# EAGLE board Glove-WiFi-M0-v0.5 (EAGLE 7.7.0)
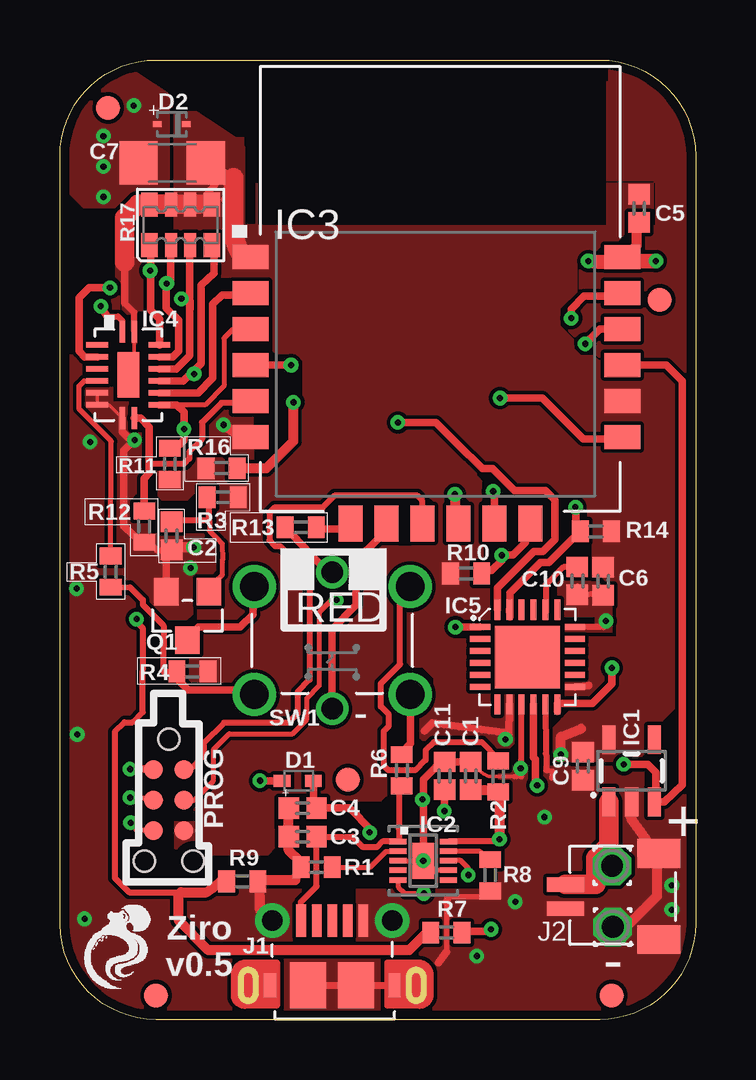
[diagram p0: board, top side]
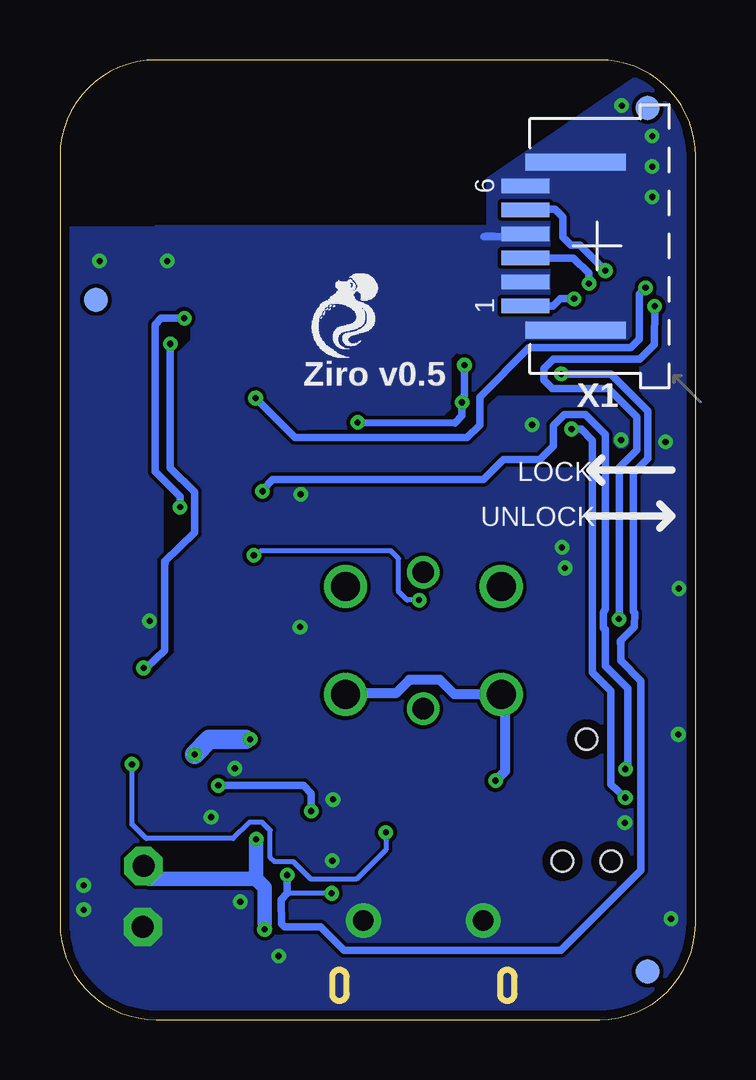
[diagram p1: board, bottom side, seen from below]

Size 26.5 x 40 mm. Coordinates in mm from the lower left corner, seen from the top.
Outline: 0,36.04 0,3.96 arc89 4,0 22.5,0 arc90 26.5,4 26.5,36 arc90 22.51,40 6,40 4,40 arc90 0,36
Copper layers (1*16): Top 0.0356mm / dielectric 1.5011mm / Bottom 0.0356mm
Design rules "oshpark-2layer-via-buried": minimum track width 6mil, minimum drill 10mil, track to track 6mil, track to pad 6mil, pad to pad 6mil, via to via 6mil, smd to smd 6mil, copper to edge 15mil, drill to drill 6mil, minimum pad ring 7mil, minimum via ring 7mil, stop-mask expansion 2.5mil, vias tented up to drill 16mil, thermal gap 10mil
tRestrict: area 16.6,15.9 to 17,16; area 7.7,33.2 to 8.1,38.3; area 21,16.5 to 22.3,16.8; 126 lines
bRestrict: 32 lines

## Footprints (pad centres in the part's own frame; a part is rotated, then mirrored left to right if it is on the bottom)
1,6/0,9 = drill 0.914 pad 1.6 octagon: 1 0,0
0402-CAP = smd 0.85 x 0.9: 1 -0.58,0; 2 0.58,0
1206 = smd 1.6 x 1.8: 1 -1.4,0; 2 1.4,0
SOD523 = smd 0.7 x 0.5: A 0.7,0; C -0.6,0
SOD-923 = smd 0.36 x 0.25: A -0.6,0; C 0.6,0
FIDUCIAL-1X2 = smd 1 x 1: 1 0,0
SOT23-5 = smd 0.55 x 1.2: 1 -0.95,-1.3; 2 0,-1.3; 3 0.95,-1.3; 4 0.95,1.3; 5 -0.95,1.3
BQ24040DSQR = smd 0.7 x 0.23: 1 -1.05,0.8; 2 -1.05,0.4; 3 -1.05,0; 4 -1.05,-0.4; 5 -1.05,-0.8; 6 1.05,-0.8; 7 1.05,-0.4; 8 1.05,0; 9 1.05,0.4; 10 1.05,0.8 | smd 0.914 x 1.499: 11 0,0 | drill 0.254 pad 0.508: V 0,0
WT8266 = smd 1.5 x 1: 1 -7.9,1.35; 2 -7.9,-0.15; 3 -7.9,-1.65; 4 -7.9,-3.15; 5 -7.9,-4.65; 6 -7.9,-6.15; 13 7.6,-6.15; 14 7.6,-4.65; 15 7.6,-3.15; 16 7.6,-1.65; 17 7.6,-0.15; 18 7.6,1.35 | smd 1 x 1.5: 7 -3.75,-9.75; 8 -2.25,-9.75; 9 -0.75,-9.75; 10 0.75,-9.75; 11 2.25,-9.75; 12 3.75,-9.75
DHVQFN16 = smd 0.24 x 0.9: 1 -0.25,1.8; 8 -0.25,-1.8; 9 0.25,-1.8; 16 0.25,1.8 | smd 0.9 x 0.24: 2 -1.3,1.25; 3 -1.3,0.75; 4 -1.3,0.25; 5 -1.3,-0.25; 6 -1.3,-0.75; 7 -1.3,-1.25; 10 1.3,-1.25; 11 1.3,-0.75; 12 1.3,-0.25; 13 1.3,0.25; 14 1.3,0.75; 15 1.3,1.25 | smd 0.9 x 1.9: EPAD 0,0
QFN.24.4X4 = smd 0.85 x 0.25: 1 -1.975,1.25; 2 -1.975,0.75; 3 -1.975,0.25; 4 -1.975,-0.25; 5 -1.975,-0.75; 6 -1.975,-1.25; 13 1.975,-1.25; 14 1.975,-0.75; 15 1.975,-0.25; 16 1.975,0.25; 17 1.975,0.75; 18 1.975,1.25 | smd 0.25 x 0.85: 7 -1.25,-1.975; 8 -0.75,-1.975; 9 -0.25,-1.975; 10 0.25,-1.975; 11 0.75,-1.975; 12 1.25,-1.975; 19 1.25,1.975; 20 0.75,1.975; 21 0.25,1.975; 22 -0.25,1.975; 23 -0.75,1.975; 24 -1.25,1.975 | smd 2.7 x 2.6: EPAD 0,0
USB-MICRO-MOLEX-105017-0001 = smd 0.4 x 1.35: 1 -1.3,1.3; 2 -0.65,1.3; 3 0,1.3; 4 0.65,1.3; 5 1.3,1.3 | drill 0.85 pad 1.45: G1 -2.5,1.3; G2 2.5,1.3 | smd 1.5 x 1.9: G3 1,-1.4; G4 -1,-1.4 | smd 0.5 x 1: G5 -2.6,-1.4; G6 2.6,-1.4
CONN-JST-SHR-1MM = smd 0.6 x 1.55: 1 -0.5,1.8; 2 0.5,1.8 | smd 1.2 x 1.8: EP@1 -1.8,-2.1; EP@2 1.8,-2.1
TC2030-MCP-NL = smd 0.787 x 0.787: 1 1.27,-0.635; 2 1.27,0.635; 3 2.54,-0.635; 4 2.54,0.635; 5 3.81,-0.635; 6 3.81,0.635 | hole 0.889: 0,0; 5.08,-1.016; 5.08,1.016
SOT-23 = smd 1.016 x 1.143: 1 -0.889,-1.016; 2 0.889,-1.016; 3 0,1.016
R0402 = smd 0.7 x 0.9: 1 -0.65,0; 2 0.65,0
RA1206-8 = smd 0.7 x 1: 1 -1.3,-0.85; 4 1.3,-0.85; 5 1.3,0.85; 8 -1.3,0.85 | smd 0.5 x 1: 2 -0.4,-0.85; 3 0.4,-0.85; 6 0.4,0.85; 7 -0.4,0.85
TACTILE-LED-ON-MOM = drill 1.2: A-1 -3.25,2.25; A-2 3.25,2.25; B-1 -3.25,-2.25; B-2 3.25,-2.25 | drill 0.9: DA 0,2.85; DC 0,-2.85
CONN-6POS-FPC = smd 0.6 x 2: 1 -2.5,3; 2 -1.5,3; 3 -0.5,3; 4 0.5,3; 5 1.5,3; 6 2.5,3 | smd 0.7 x 4.2: EPAD@1 -3.5,0.9; EPAD@2 3.5,0.9

## Placement (x,y rotation side)
B+  WIREPAD1,6/0,9  [1,6/0,9]  23.02,6.4 90 top
B-  WIREPAD1,6/0,9  [1,6/0,9]  23.05,3.86 90 top
C1  10uF  [0402-CAP]  17.13,10.16 90 top
C2  10uF  [0402-CAP]  4.66,20.17 270 top
C3  0.1uF  [0402-CAP]  10.12,7.62 180 top
C4  DNI  [0402-CAP]  10.12,8.81 180 top
C5  10uF  [0402-CAP]  24.15,33.81 270 top
C6  0.1uF  [0402-CAP]  22.64,18.27 270 top
C7  100u  [1206]  4.68,35.71 180 top
C9  10nF  [0402-CAP]  21.8,10.57 270 top
C10  2.2nF  [0402-CAP]  21.57,18.28 270 top
C11  0.1uF  [0402-CAP]  16.04,10.16 90 top
D1  PMEG3005EB  [SOD523]  9.96,9.96 180 top
D2  ESD9X5.0ST5G  [SOD-923]  4.67,37.31 0 top
FD1  FIDUCIAL1X2  [FIDUCIAL-1X2]  12,10 0 top
FD2  FIDUCIAL1X2  [FIDUCIAL-1X2]  4,1 0 top
FD3  FIDUCIAL1X2  [FIDUCIAL-1X2]  23,1 0 top
FD5  FIDUCIAL1X2  [FIDUCIAL-1X2]  2,38 0 top
FD6  FIDUCIAL1X2  [FIDUCIAL-1X2]  25,30 0 top
FD7  FIDUCIAL1X2  [FIDUCIAL-1X2]  25,30 0 bottom
FD8  FIDUCIAL1X2  [FIDUCIAL-1X2]  2,2 0 bottom
FD9  FIDUCIAL1X2  [FIDUCIAL-1X2]  2,38 0 bottom
IC1  AP2112K-3.3V  [SOT23-5]  23.84,10.37 0 top
IC2  BQ24040DSQR_BMS  [BQ24040DSQR]  15.15,6.62 0 top
IC3  WT8266  [WT8266]  15.86,30.43 0 top
IC4  74HC4051_DHVQFN16  [DHVQFN16]  2.85,26.87 0 top
IC5  MPU-6050  [QFN.24.4X4]  19.5,15.11 0 top
J1  Micro-USB  [USB-MICRO-MOLEX-105017-0001]  11.35,2.83 0 top
J2  [CONN-JST-SHR-1MM]  22.87,5.13 90 top
PROG  [TC2030-MCP-NL]  4.54,11.69 270 top
Q1  2N7002-NMOS  [SOT-23]  5.32,16.83 180 top
R1  3k  [R0402]  10.7,6.35 0 top
R2  10k  [R0402]  18.27,10.13 270 top
R3  300k  [R0402]  6.79,21.77 0 top
R4  300k  [R0402]  5.52,14.51 180 top
R5  3k  [R0402]  2.12,18.67 90 top
R6  30k  [R0402]  14.26,10.39 90 top
R7  30k  [R0402]  16.11,3.63 0 top
R8  10k  [R0402]  17.94,6.02 90 top
R9  3k  [R0402]  7.6,5.76 180 top
R10  3k  [R0402]  16.94,18.59 180 top
R11  3k  [R0402]  4.58,23.16 270 top
R12  3k  [R0402]  3.51,20.55 90 top
R13  330E  [R0402]  10.04,20.52 0 top
R14  3k  [R0402]  22.34,20.35 0 top
R16  3k  [R0402]  6.74,22.99 180 top
R17  500k  [RA1206-8]  5.03,33.12 0 top
SW1  [TACTILE-LED-ON-MOM]  11.35,15.8 0 top
U$1  [OCTO_LOGO]  0.61,1.09 0 top
U$2  [OCTO_LOGO]  16.4,27.4 0 bottom
X1  CONN-FPC-6POS  [CONN-6POS-FPC]  4.1,32.24 90 bottom

## Library data of the parts
B+ B- = wirepad
C1-C6 C9-C11 = 1_ZeroUI; PROD_ID: CAP-12416
C7 = SparkFun-Passives
D1 = diode
D2 IC3-IC5 J1 J2 SW1 U$1 U$2 X1 = 1_ZeroUI
FD1-FD3 FD5-FD9 = SparkFun-Aesthetics
IC1 = SparkFun-PowerIC; PROD_ID: VREG-12457
IC2 = 1_ZeroUI; 3D_LIBRARY_NAME: TI_AllParts_2012-12-25; COPYRIGHT: Copyright (C) 2015 Accelerated Designs. All rights reserved; DATASHEETURL: http://www.ti.com/lit/gpn/BQ24040; FAMILY_NAME: BATTERY CHARGE MANAGEMENT; GENERIC_PART_NUMBER: BQ24040; INDUSTRY_STD_PKG_TYPE: SON; MANUFACTURER: Texas Instruments; MANUFACTURER_PART_NUMBER: BQ24040DSQR; PACKAGE_DESIGNATOR: DSQ; PIN_COUNT: 10; VENDOR: Vendor
PROG = tag-connect
Q1 = 1_ZeroUI; MPN: 2N7002,215
R1-R14 R16 = rcl
R17 = Seeed-OPL-Resistor

## Nets
3.3V: C5.1 C6.1 C7.1 C9.1 D2.C IC1.5 IC3.1 IC3.14 IC4.16 IC4.EPAD IC5.8 IC5.13 PROG.6 R3.2 R4.1 R10.2 R11.2 R14.2 R16.2 R17.5 R17.6 R17.7 R17.8
5V: C3.1 IC2.1 J1.1 R6.1
/POWEROFF_SWINT: IC4.5 R5.2
/RST: IC3.12 PROG.4 R10.1
CHG_ON: IC2.5 IC2.8 IC4.12 R17.4
GND: B-.1 C1.2 C2.2 C3.2 C4.2 C5.2 C6.2 C7.2 C9.2 C10.2 C11.2 D2.A IC1.2 IC2.3 IC2.7 IC2.11 IC2.V IC3.6 IC3.10 IC3.18 IC4.6 IC4.7 IC4.8 IC5.1 IC5.9 IC5.11 IC5.18 J1.5 J1.G1 J1.G2 J1.G3 J1.G4 J1.G5 J1.G6 J2.1 J2.EP@1 J2.EP@2 PROG.5 Q1.2 R1.1 R8.1 R9.1 R12.1 X1.2 X1.4 X1.6 X1.EPAD@1 X1.EPAD@2
I2C_N: IC3.4 IC5.24 R16.1
I2C_P: IC3.17 IC5.23 R14.1
LED-G-A: IC3.7 R13.2
LED-G-C: IC3.8 SW1.DC
MPU_INT: IC3.16 IC5.12
MUX_COM: IC3.13 IC4.3
MUX_S0: IC3.2 IC4.11
MUX_S2: IC3.5 IC4.9 R12.2
N$1: IC4.15 R17.1 X1.5
N$2: C11.1 IC5.10
N$3: C10.1 IC5.20
N$4: IC4.14 R17.2 X1.3
N$5: IC4.13 R17.3 X1.1
N$6: R13.1 SW1.DA
N$9: C2.1 Q1.1 R3.1
N$10: IC2.2 R1.2
N$11: Q1.3 R2.1 SW1.A-1 SW1.A-2
N$12: D1.A R4.2 R5.1 R6.2 SW1.B-1 SW1.B-2
N$13: IC2.9 R8.2
PROGL/MUX_S1: IC3.3 IC4.10 PROG.3 R11.1
PWR_EN: C4.1 D1.C IC1.3 IC3.15
RXD: IC3.9 PROG.2
TXD: IC3.11 PROG.1
V_BATT: B+.1 C1.1 IC1.1 IC2.10 J2.2 R2.2 R7.2
VBATT_SENSE: IC4.1 R7.1 R9.2

## Tracks (layer width: path | path; a pad name or v marks a point on that pad's centre or on a via)
3.3V  (via drill 0.25)
  Top 0.152: IC4.16 3.1,27.12 IC4.EPAD
  Top 0.254: IC4.16 3.1,29.47 2.7,29.86
  Top 0.305: 2.7,29.86 2.69,31.57 | 5.8,33.98 6.87,35.31 | 6.87,35.31 C7.1 | 6.87,34.18 7.25,35.1 6.87,35.31 | IC5.13 21.82,13.88 22.06,13.92 | 15.2,12.04 15.53,12.37 18.5,11.96 v18.58,11.68 18.73,11.73 IC5.8 | R17.6 R17.7 R17.8
  Top 0.406: v20.89,11.05 20.89,11.79 21.73,12.12
  Top 0.813: 2.69,31.57 2.7,32.06 2.7,33.43 3.26,33.98 5.8,33.98 | 7.48,32.02 7.25,32.61 7.25,35.1
  Bottom 0.406: v18.58,11.68 18.75,11.68
  Bottom 0.813: 18.75,11.68 20.28,11.68 v20.89,11.05
  pour Top (rank 2, no thermals): 29.75,-0.19 -0.73,-0.19 -0.73,31.75 4.8,31.72 4.8,37.8 6.18,37.8 6.18,44.3 5.11,44.3 5.12,48.26 29.75,48.26
5V
  Top 0.254: C3.1 12.2,7.62 12.64,7.18 13.21,7.18 13.44,7.42 13.75,7.42 14.13,7.42 | 14.13,7.42 14.13,7.95 14.13,9.58 R6.1 | J1.1 10.05,4.52 10.04,4.51 10.04,4.9 10.7,5.56 C3.1 | IC2.1 14.13,7.42
  Top 0.305: C3.1
/POWEROFF_SWINT
  Top 0.203: R5.2 2.14,24.11 0.8,25.45 0.8,25.6 0.8,26.41 1.01,26.62 IC4.5
/RST  (via drill 0.25)
  Top 0.152: IC3.12 19.5,20.59 19.31,20.32
  Top 0.203: PROG.4 5.59,9.14 6.4,9.96 6.4,11.25 7.06,11.91 9.69,11.91 10.3,12.52 10.3,13.39 10.82,13.92 10.83,16.99 11.32,17.48 v11.53,17.48 | 17.46,18.72 R10.1 | 19.41,20.28 19.39,20.43
  Top 0.305: 19.39,20.43 19.31,20.32 19.31,20.43 | 19.54,20.72 IC3.12 | 17.46,18.72 17.86,18.72 18,18.72 18.42,19.14 v18.42,19.36 18.88,19.36 19.41,19.89 19.41,20.28
  Bottom 0.203: v11.53,17.48 12.03,17.48 12.38,17.84 12.38,19.21 12.7,19.53 18.12,19.53 v18.42,19.36
CHG_ON  (via drill 0.25)
  Top 0.203: IC2.5 14.1,5.54 14.4,5.25 v15.17,5.26 | v17.03,6.02 17.03,6.31 16.71,6.63 IC2.8
  Top 0.305: 5.13,26.62 5.88,27.35 5.88,29.9 5.88,30.62 6.43,31.11 6.43,32.28 R17.4 | 5.13,26.62 IC4.12 | 5.13,26.62 5.46,26.93 v5.6,26.91
  Bottom 0.203: v15.17,5.26 17.03,5.26
  Bottom 0.305: v17.03,6.02 17.03,5.26 17.28,5 17.27,4 17.13,3.86 15.63,3.86 14.65,2.88 5.62,2.88 2.29,6.22 2.29,14.12 3.13,14.97 3.13,15.75 3.13,15.67 3.13,15.77 2.54,16.36 2.54,16.94 2.59,17.02 2.59,22.78 1.98,23.39 1.98,25.37 3.52,26.91 v5.6,26.91
GND  (via drill 0.25)
  Top 0.152: IC4.8 2.05,25.62 IC4.7 IC4.6 | 17.41,10.54 arc49 17.9,10.13 18.94,10.13
  Top 0.203: 14.1,6.6 IC2.3 IC2.V | IC2.7 15.56,6.22 | 16.11,4.9 16.11,2.83 | C1.2 17.39,10.54 17.41,10.54 | 16.15,5.1 16.19,5.05 | 18.94,10.13 19.04,10.15 | 20.28,10.39 20.56,10.36 20.5,10.09 20.51,10.06 | PROG.5 3.2,7.88 3.05,8.2 v2.95,8.2
  Top 0.254: 16.01,10.75 C11.2 | IC5.18 22.67,16.36 22.84,16.51 | 21.58,18.07 C10.2 22.84,17.8 C6.2 | R8.1 17.92,5.36 17.67,5.12 17.57,5.12 16.15,5.1 | IC5.9 19.24,13.12 19.24,10.13 19.04,10.15 | IC5.11 20.25,11.07 20.28,11.03 20.28,10.39 | 3.71,19.91 4.06,19.56 C2.2 | 23.07,31.62 23.63,31.62 23.66,31.75 22.21,31.67 22.21,31.45 22.28,31.42 22.92,31.42 23.05,31.5
  Top 0.305: 11.06,1.4 J1.G6 | 15.56,6.22 IC2.V 15.15,10 15.86,10.72 15.89,10.72 C11.2 | 16.11,2.83 15.78,2.36 | C5.2 24.04,33.18 | 23.55,31.77 23.53,31.77 23.37,31.8 IC3.18 | C1.2 16.01,10.75 | 16.68,20.65 IC3.10 | 7.73,24.16 IC3.6 | 16.19,5.05 16.11,4.9 | IC4.8 2.6,24.51 2.95,24.16 v3.11,24.16 2.67,23.71 2.67,20.58 3.08,20.17 3.71,19.91 R12.1 | 22.84,16.51 22.87,16.54 22.87,16.66 22.82,16.71 | Q1.2 4.43,19.41 C2.2 | IC5.1 17.44,16.36 v16.49,16.36 16.47,16.28 | R9.1 9.38,5.82
  Top 0.406: 24.04,33.18 24.04,32.26 23.55,31.77 | J1.G1 8.35,4.55 8.32,5.82 9.38,5.82 9.81,5.82 10.03,6.27 R1.1 10.03,6.57 9.53,7.06 C3.2 C4.2 | v6.82,24.79 7.73,24.16 | v16.47,21.89 16.47,20.73 16.49,20.7 16.49,20.65 | v22.03,31.62 22.06,31.67 | 23.25,31.67 23.33,31.6 23.35,31.62 | v5.57,19.68 4.68,19.68 | 4.71,19.61 4.68,19.58 4.7,19.56 C2.2 | 23.6,3.86 24.9,5.16 24.9,6.86 23.81,8.39 IC1.2 | 22.03,31.55 22.06,31.67 | 22.06,31.67 22.21,31.67 23.25,31.67 | 23.25,31.67 23.43,31.75
  Top 0.61: v24.85,31.62 23.07,31.62
  Bottom 0.305: X1.4 7.21,32.64 8.47,32.64 | 8.47,32.64 8.82,32.64 | X1.6 7.13,34.77 | 8.47,32.64 8.42,32.66 8.72,32.66
  other vias: 1.81,36.83 1.81,35.56 1.81,34.29 3.08,38.1 22.77,16.62 17.38,2.65 19.21,10.47 25.51,5.59 25.51,4.58 5.44,18.82 0.69,17.97 0.72,11.89 18.98,4.91 1.25,24.08 15.11,9.17 20.2,8.44 1.02,4.2
  pour Bottom (isolate 0.025, rank 2, no thermals): 25.94,-2.54 25.94,3.81 28.48,3.81 28.48,41.91 -3.27,41.91 -3.27,-2.54
  pour Top (isolate 0.025, rank 3, no thermals): 4.61,37.18 4.61,38.37 1.65,41.29 -1.69,41.25 -1.69,33.99 -1.72,33.99 -1.72,22.92 8,22.92 7.9,37.1
  pour Top (no thermals): 20.81,18.64 22.07,18.67 22.97,17.47 22.97,16.05 20.78,16.05
  pour Top (no thermals): -2.02,19.79 1.48,19.79 3.32,17.81 3.29,16.72 3.21,12.6 2.29,12.15 2.21,6 2.22,5.97 3.01,5.36 18.37,5.36 18.37,10.49 27.24,10.49 27.21,-1.27 -2,-1.27
  pour Top (no thermals): 0.01,26.54 2.04,26.54 2.04,25.65 3.56,24.27 3.56,20.17 6.24,20.19 6.74,19.54 6.74,16.59 3.03,16.56 3.03,17.25 1.97,18.31 0.01,18.39
I2C_N  (via drill 0.25)
  Top 0.305: IC3.4 v9.63,27.28 | IC5.24 18.25,18 19.76,19.51 20.13,19.51 20.63,20.01 20.63,21.65 20.23,22.05 18.94,22.05 18.02,22.96 17.61,22.96 16.56,24.01 15.68,24.89 v14.09,24.89
  Top 0.406: R16.1 8.61,22.99 9.74,24.11 v9.74,25.73
  Bottom 0.305: v9.63,27.28 9.63,26.01 9.74,25.91 v9.74,25.73 9.74,25.17 10.04,24.87 v14.09,24.89
I2C_P  (via drill 0.25)
  Top 0.152: IC3.17 23.35,30.25 23.25,30.15
  Top 0.305: 21.55,20.47 21.5,20.15 20.39,19.05 20.02,19.05 18.75,17.78 18.75,16.79 IC5.23 | 23.25,30.15 21.85,30.15 21.32,29.62 v21.32,29.23 | v21.5,21.36 21.52,20.45 21.55,20.47 | 21.55,20.47 21.5,20.3 21.8,20.3 R14.1
  Bottom 0.305: v21.32,29.23 22.28,29.23 22.54,28.98 22.54,22.84 21.5,21.79 v21.5,21.36
LED-G-A
  Top 0.152: 11.95,20.57 11.95,20.63
  Top 0.254: 11.77,20.45 11.95,20.57 | 11.95,20.63 IC3.7
  Top 0.305: R13.2 10.97,20.45 11.77,20.45
LED-G-C
  Top 0.305: IC3.8 13.5,20.11 13.27,20.05 12.34,19.13 12.34,17.28 11.34,16.27 11.34,12.97 SW1.DC
MPU_INT  (via drill 0.25)
  Top 0.305: IC3.16 22.51,28.78 v21.9,28.17 | v23.02,14.66 23.02,13.98 22.21,13.17 20.75,13.17 20.75,12.85 IC5.12
  Bottom 0.305: v21.9,28.17 21.9,22.99 20.89,21.99 20.89,20.3 22.13,19.08 22.12,19.01 22.13,19.02 22.13,15.39 22.88,14.67 v23.02,14.66
MUX_COM  (via drill 0.25)
  Top 0.152: IC3.13 23.04,24.28 22.96,24.2
  Top 0.305: IC4.3 1.03,27.62 0.8,27.86 0.8,30.09 1.22,30.51 v2.09,30.5 | v18.35,25.91 20.12,25.91 21.83,24.2 22.96,24.2
  Bottom 0.305: v2.09,30.5 2.35,30.24 2.35,28.36 2.69,28.02 6.94,28.02 9,25.96 9,24.79 9.53,24.26 16.7,24.26 v18.35,25.91
MUX_S0
  Top 0.152: 7.32,30.23 7.32,30.2
  Top 0.203: 7.32,30.23 7.37,30.28 IC3.2
  Top 0.305: IC4.11 5.75,26.12 6.37,26.74 6.37,29.82 6.76,30.2 7.32,30.2
MUX_S2
  Top 0.152: 7.8,25.7 7.8,25.72 IC3.5
  Top 0.254: 7.8,25.7 6.74,25.7 5.93,24.89 5.93,24.19 5.39,23.67 5.39,23.38 5.17,23.16 3.73,23.16
  Top 0.305: IC4.9 3.18,25.07 3.35,25.07 3.73,24.7 3.73,23.16 3.72,22.88 3.72,22.78 3.51,22.55 R12.2
N$1  (via drill 0.25)
  Top 0.305: IC4.15 4.15,29.21 3.78,29.58 3.78,31.23 | v3.76,31.22 3.78,31.23 | 3.78,31.23 3.78,32.22 R17.1
  Bottom 0.305: X1.5 6.97,33.78 5.87,33.78 5.54,33.45 5.54,32.61 5.21,32.28 4.83,32.28 v3.76,31.22
N$2  (via drill 0.25)
  Top 0.305: C11.1 v16.03,8.69 | v19.9,9.75 19.82,9.88 19.82,10.85 19.74,10.93 IC5.10
  Bottom 0.305: v16.03,8.69 16.03,9.43 16.35,9.75 v19.9,9.75
N$3
  Top 0.254: 21.74,19 C10.1 21,18.86 20.25,18.12 20.25,16.95 IC5.20
N$4  (via drill 0.25)
  Top 0.305: IC4.14 4.69,27.62 4.94,27.87 4.94,29.16 4.43,29.65 4.43,30.46 v4.45,30.68 4.45,30.63 4.62,30.81 R17.2
  Bottom 0.305: X1.3 5.58,31.75 5.1,31.75 4.45,31.11 v4.45,30.68
N$5  (via drill 0.25)
  Top 0.305: IC4.13 4.85,27.12 5.42,27.69 5.42,29.57 | 5.42,29.57 5.42,29.62 5.42,29.95 v5.06,30.05 | 5.42,29.57 5.42,31.8 5.44,32 R17.3
  Bottom 0.305: X1.1 5.95,29.74 5.64,30.05 v5.06,30.05
N$6
  Top 0.305: SW1.DA 11.17,18.66 9.72,20.18 R13.1
N$9
  Top 0.203: 6.15,18.03 6.11,18.25 6.52,18.3 6.77,18.55 6.77,19.16 6.77,19.83 6.54,20.07 6.23,20.37 6.23,20.82 6.22,20.83
  Top 0.254: 6.36,17.93 6.33,18.14 6.15,18.03 | R3.1 6.13,21.64 6.22,21.53 6.22,20.83 4.86,20.83 C2.1
  Top 0.305: Q1.1 6.36,17.93
N$10
  Top 0.203: R1.2 12.93,6.35 13.59,7.01 14.13,7.01 IC2.2
N$11
  Top 0.254: 18.27,10.87 17.58,11.56 15.57,11.56 15.25,11.23 15.25,10.82 14.82,10.39 13.69,10.39 13.5,10.58 13.5,12.02 13.72,12.24 13.72,12.71 13.38,13.04 13.38,14.01 14.18,14.81 14.18,17.66 SW1.A-2
  Top 0.305: SW1.A-1 8.06,16.89 7.5,16.36 5.79,16.36 5.52,16.08 Q1.3 | R2.1 18.27,10.87
N$12  (via drill 0.25)
  Top 0.254: R5.1 2.91,18.03 3.45,17.49 3.45,17.3 3.91,16.84 4.32,16.43 4.31,14.5 R4.2
  Top 0.305: v8.34,9.96 D1.A | R6.2 14.26,11.12 14.61,11.51 14.61,13.46 SW1.B-2 | R4.2 4.87,14.22 5.35,13.74 7.86,13.74 SW1.B-1
  Bottom 0.305: 7.94,13.72 SW1.B-1
  Bottom 0.406: v8.34,9.96 7.94,10.36 7.94,13.72 | SW1.B-1 10.06,13.56 10.67,14.16 11.94,14.16 12.5,13.6 14.5,13.6
N$13
  Top 0.203: IC2.9 17.48,7.02 17.92,6.73 17.92,6.72
  Top 0.305: 17.92,6.72 R8.2
PROGL/MUX_S1  (via drill 0.25)
  Top 0.203: 4.87,25.62 6.04,25.62 6.84,26.42 6.84,28.4 7.2,28.75 7.76,28.75 7.81,28.7 | v2.93,9.25 3.84,9.25 PROG.3
  Top 0.305: 5.17,24.84 5.17,25.32 4.87,25.62 IC4.10 | 7.81,28.7 7.81,28.73 IC3.3 | R11.1 4.99,23.98 5.17,24.16 5.17,24.59 | 5.17,24.59 5.17,24.84 | 5.17,24.84 v5.17,24.61 | v5.17,24.61 5.17,24.59 | v5.17,24.61 5.14,24.81 5.17,24.84
  Bottom 0.305: v2.93,9.25 2.97,9.27 3.53,9.81 3.53,13.7 4.3,14.48 4.3,24.14 4.75,24.61 v5.17,24.61
PWR_EN  (via drill 0.25)
  Top 0.305: IC3.15 25.28,27.28 25.94,26.62 25.94,9.79 25.2,9.07 IC1.3 24.85,9.01 24.85,10.31 24.52,10.64 v23.5,10.64 | v12.91,7.8 12.99,7.89 12.07,8.81 C4.1 10.56,9.09 D1.C 10.59,9.91 10.65,9.93
  Bottom 0.203: v12.91,7.8 12.91,7.08 14.14,5.85 16.04,5.85 16.77,6.58 17.56,6.58 17.73,6.75 17.73,7.89 18.07,8.23 18.6,8.23 19.28,7.54 22.91,7.54 23.5,8.13 23.5,10.17 v23.5,10.64
RXD
  Top 0.254: IC3.9 15.11,21.63 14.9,21.84 11.46,21.84 10.96,21.34 8.94,21.34 8.73,21.13 8.73,19.98 8.97,19.74 9.19,19.74 10.15,18.78 arc-45 10.42,18.13 10.42,14.17 9.91,13.66 9.91,12.76 9.52,12.37 6.84,12.37 6,11.52 6,10.99 5.42,10.42 PROG.2
TXD  (via drill 0.25)
  Top 0.305: IC3.11 18.11,21.86 v18.06,22.02 | v2.92,10.44 3.75,10.44 PROG.1
  Bottom 0.305: v18.06,22.02 18.01,22.12 17.63,22.51 8.85,22.51 8.02,23.34 6.49,23.34 5.93,23.9 5.93,24.76 5.47,25.22 4.6,25.22 3.76,24.39 3.76,17.09 3.84,16.97 3.84,16.33 3.76,16.26 3.76,14.73 2.82,13.79 2.82,10.59 v2.92,10.44
V_BATT  (via drill 0.25)
  Top 0.203: v18.32,7.51 18.28,7.42
  Top 0.254: 18.28,7.42 IC2.10
  Top 0.305: R7.2 16.76,3.67 16.81,3.63 16.72,3.68 17.86,3.68 v17.97,3.76 | 18.25,9.58 R2.2
  Top 0.406: 18.25,9.58 C1.1 18.14,9.58 18.32,9.53 v18.32,7.51
  Top 0.61: 23.04,6.15 22.97,6.27
  Top 0.813: J2.2 22.33,5.63 | 22.33,5.63 22.35,6.27 22.97,6.27 | 22.89,6.04 23.04,6.19 | 23.04,6.19 23.04,6.29 B+.1 | 23.04,6.15 23.04,6.19 | IC1.1 22.89,7.28 22.33,6.73 22.33,5.63
  Bottom 0.254: 18.37,5.87 18.37,5.97 18.35,5.89
  Bottom 0.406: 17.97,4.02 v17.97,3.76 | 18.35,5.89 18.32,5.94
  Bottom 0.61: 17.97,4.02 17.97,5.52 18.35,5.89 | B+.1 22.79,5.87 18.37,5.87 | 18.32,5.94 v18.32,7.51
VBATT_SENSE  (via drill 0.25)
  Top 0.254: 5.05,5.31 2.88,5.31 2.29,5.9 2.29,11.99 2.69,12.39 3.03,12.39 3.46,12.82 3.47,16.29 3.12,16.65 v3.19,16.7 | 1.98,29.31 2.42,29.31 2.6,29.13 IC4.1
  Top 0.305: v1.7,29.73 1.98,29.31
  Top 0.406: R7.1 15.3,3.63 14.56,2.9 6.18,2.9 4.95,4.13 4.95,5.22 5.05,5.31 6.12,5.31 6.37,5.49 6.69,5.74 R9.2
  Bottom 0.305: v3.19,16.7 3.18,16.92 3.18,23.01 2.46,23.73 2.46,25.12 3.65,26.3 5.97,26.3 6.33,26.66 6.33,27 6.33,27.14 5.93,27.53 2.33,27.53 1.73,28.13 v1.7,29.73

## Text on the board
tPlace: RED | + | Ziro / v0.5 | -
bPlace: Ziro v0.5 | LOCK | UNLOCK
Reference: F(2,38) | 1 | 6 | Bottom | F(25,30) | Front | F(12,10) | F(23,1) | USB / Micro | 0.032" (32mil) / 1oz / FR4 / Black / White | F(4,1) | Note: / 1. PCB Info: / -PCB Thickness: / -Copper Pour: / -Material: / -Soldermask: / -Silkscreen: / / 2. Assembly Fiducial markers shown as F(x,y) | GLOVE v0.5
tDocu: Glove WiFi v0.5